# Altium PCB OPLink Mini.PcbDoc
Units mil, origin at the board's own origin, x right, y up, seen from the top; angles counter-clockwise.
Board outline 826.77 x 1063.1 mil, 4 copper layers (Top Layer, PWR, GND, Bottom Layer), stack 39 mil thick; 43 components, 44 nets, 186 pads, 149 vias.
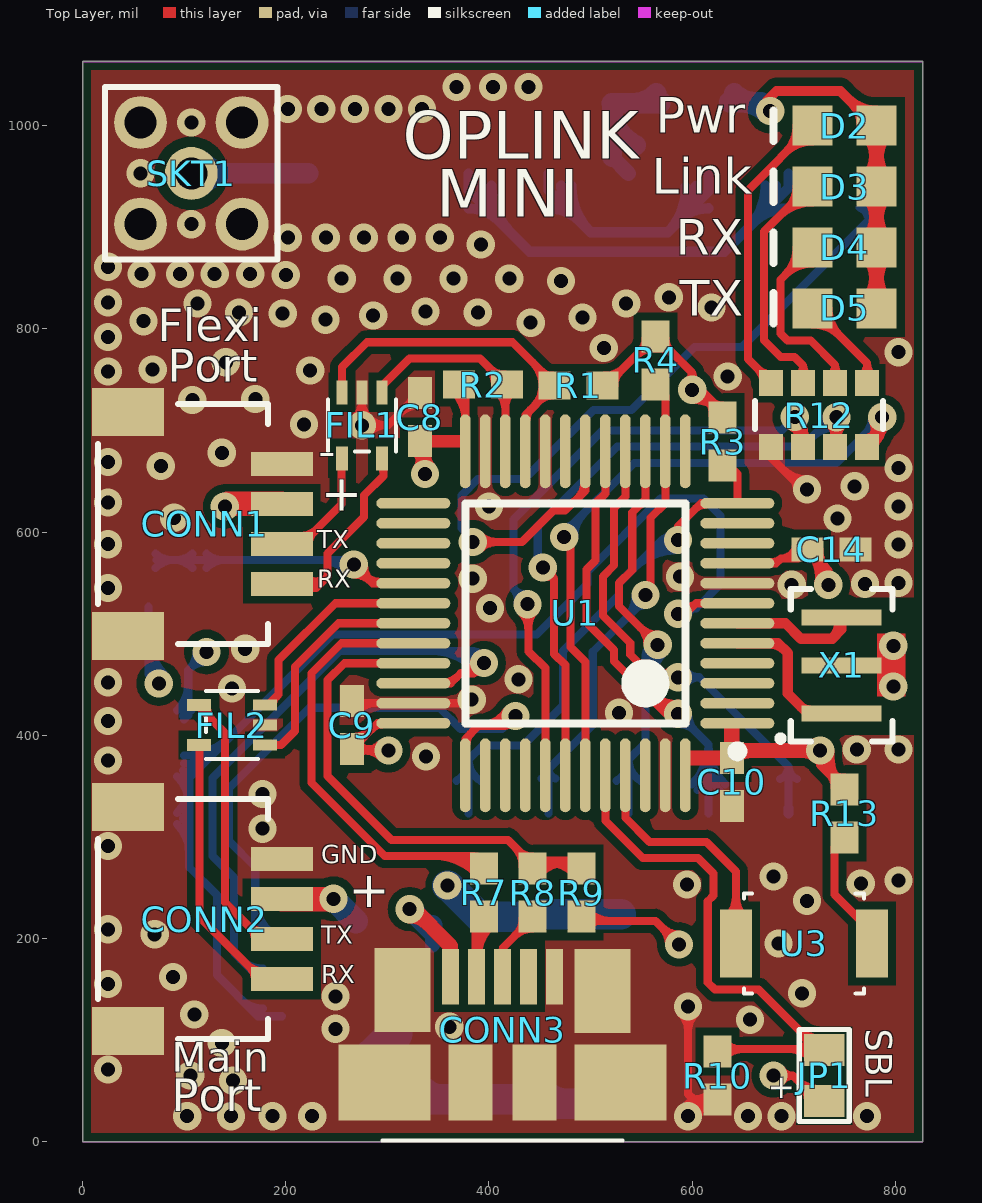
[diagram p0: Top Layer view]
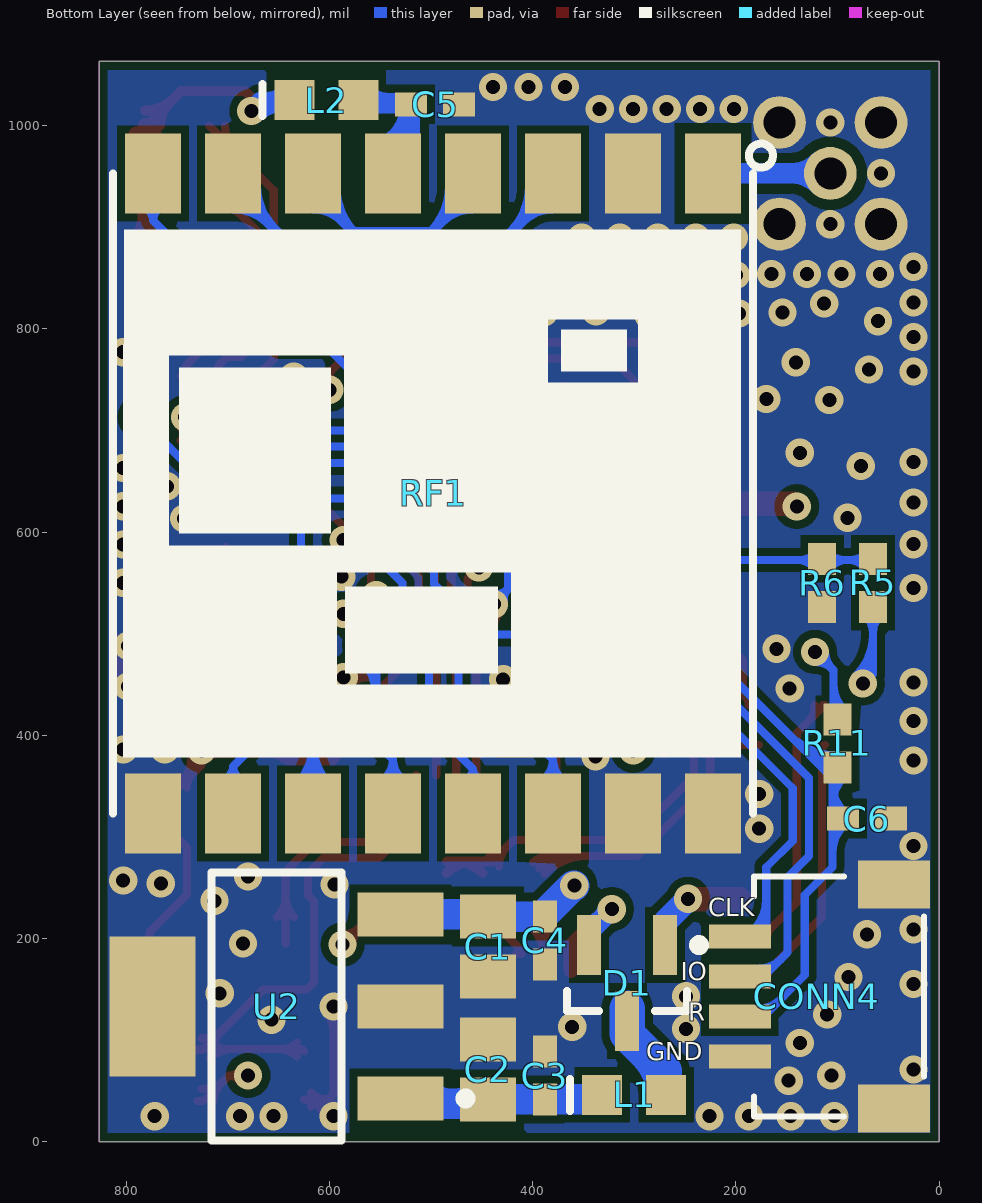
[diagram p1: Bottom Layer view, seen from below]
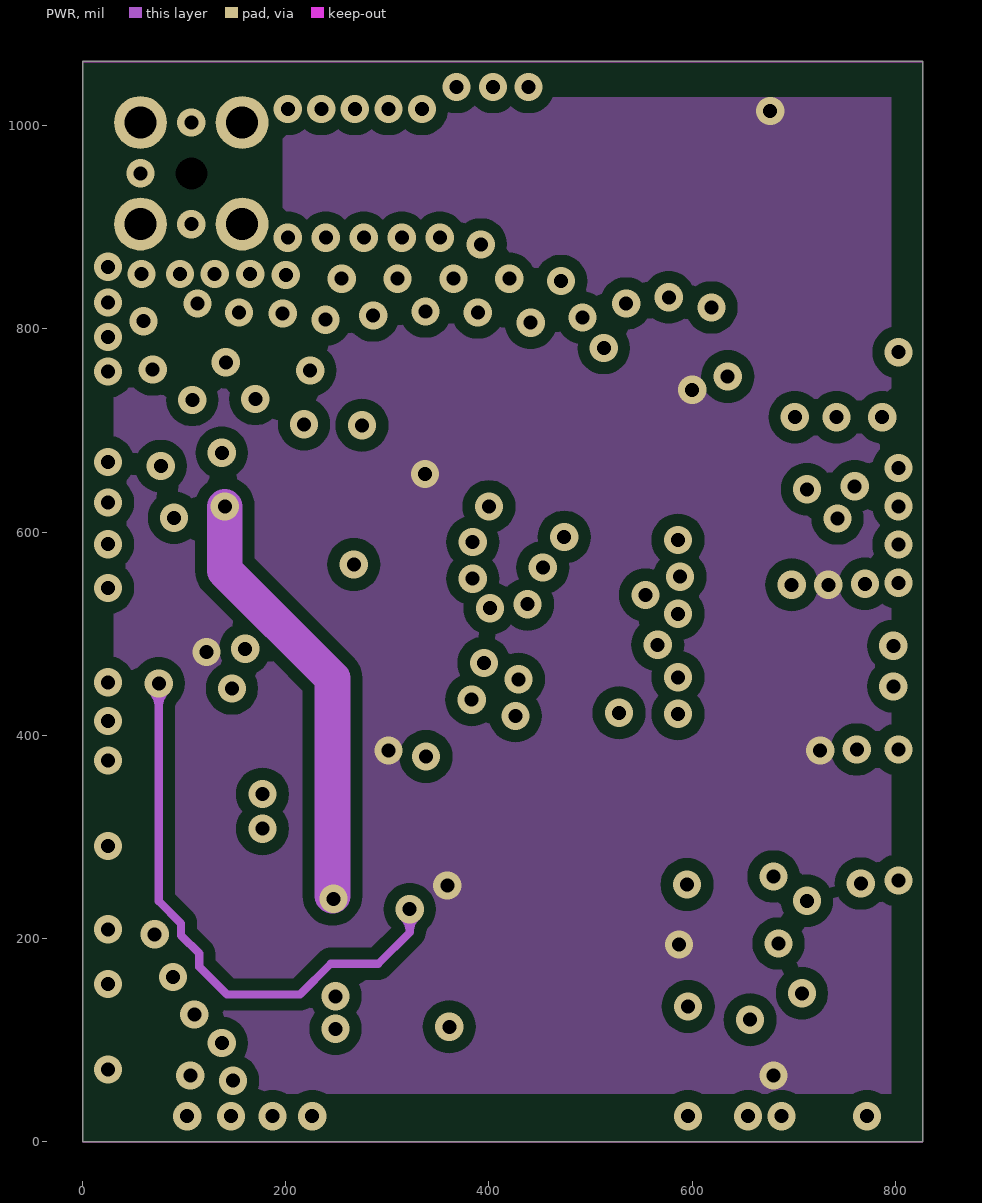
[diagram p2: PWR]
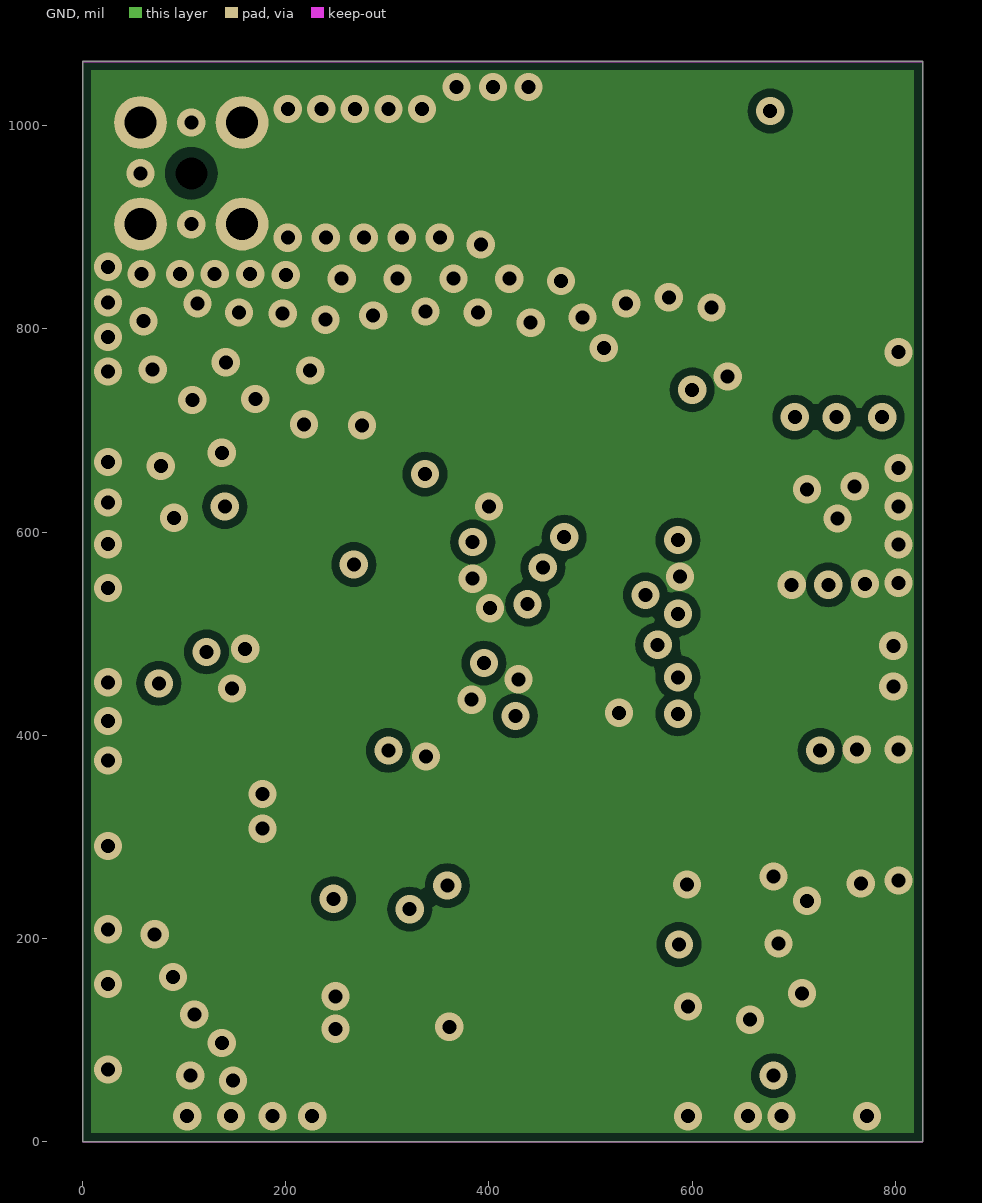
[diagram p3: GND]
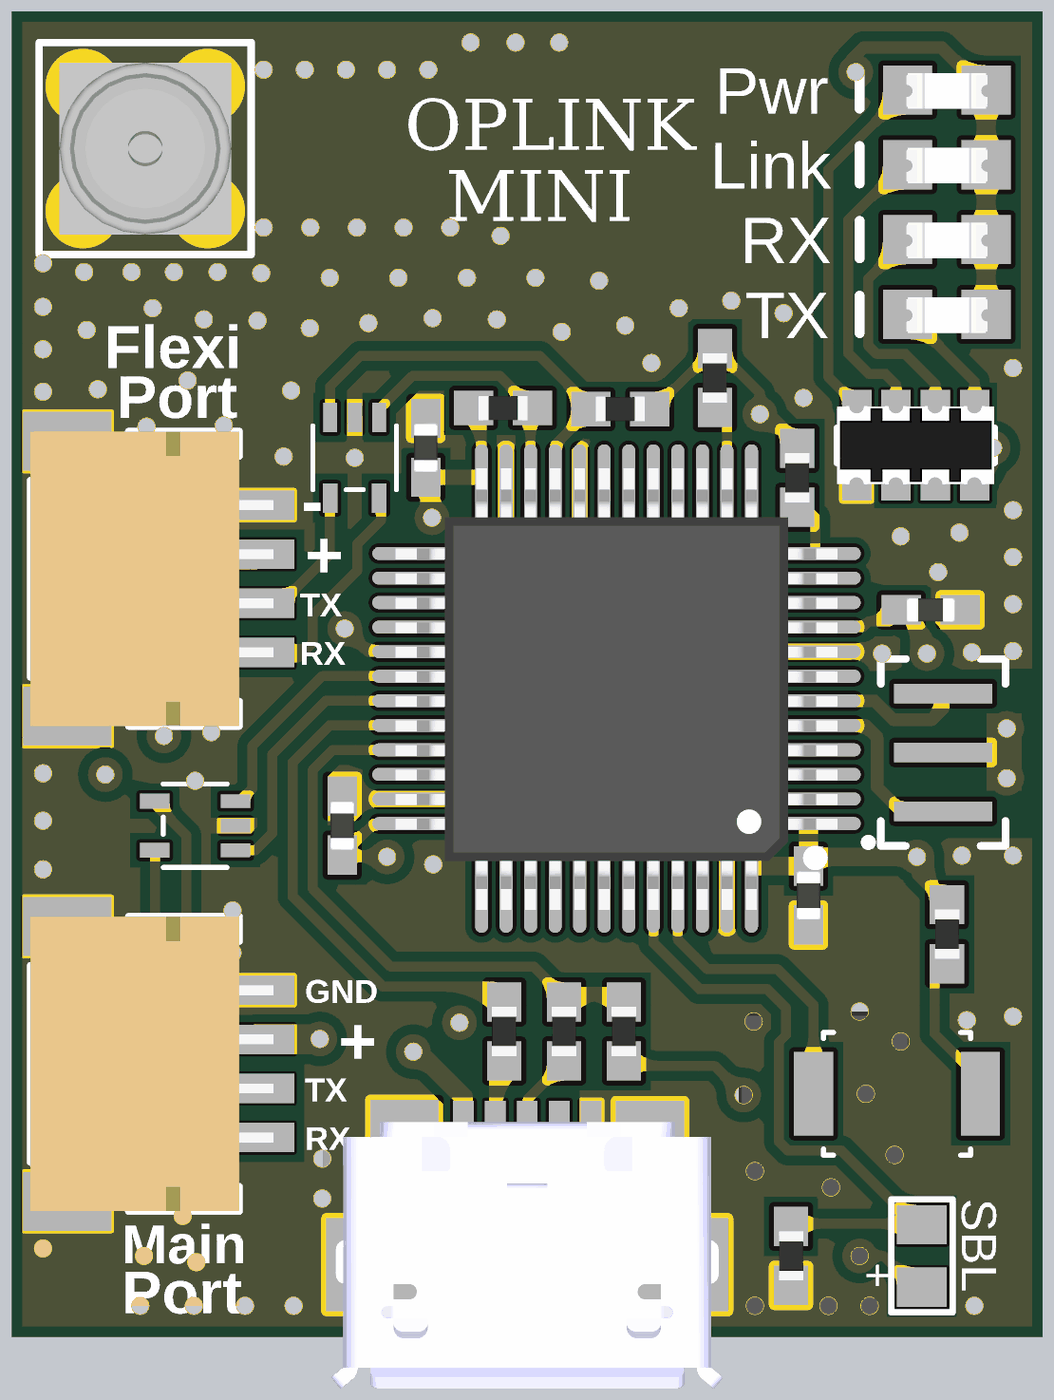
[diagram p4: 3D render of the assembled board from above, using the file's embedded part models]
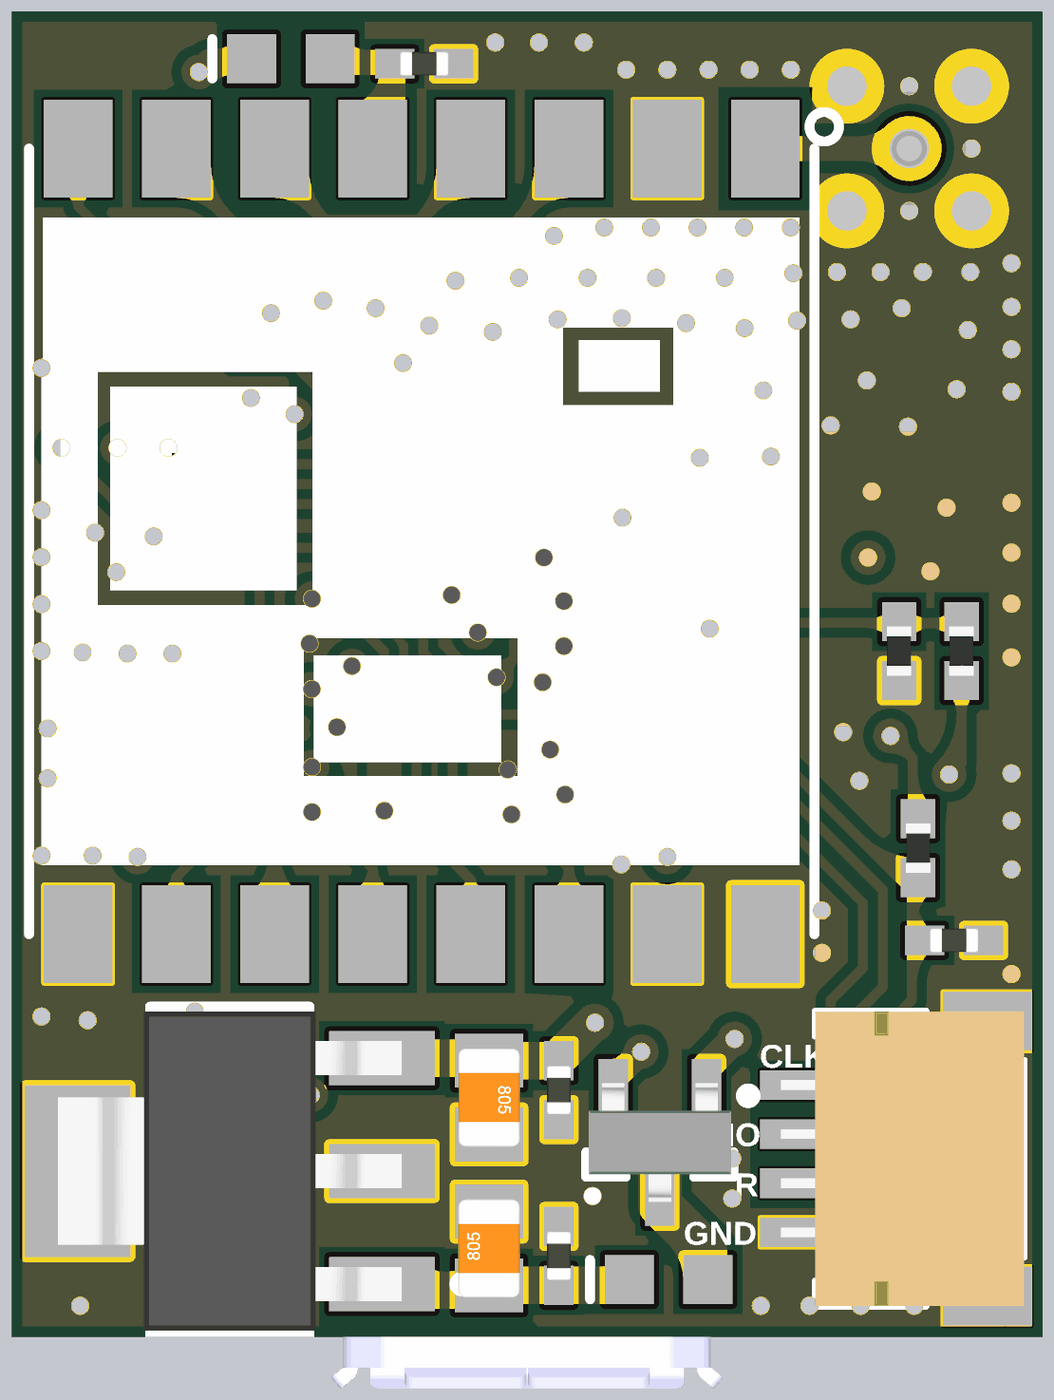
[diagram p5: 3D render of the assembled board from below, using the file's embedded part models]

## Layer stack, top to bottom
Top Layer: signal copper 2.1
Dielectric: prepreg 9, FR-4, Dk 4.3
PWR: signal copper 2.1
Dielectric: core 12.6, FR-4, Dk 4.8
GND: signal copper 2.1
Dielectric: prepreg 9, FR-4, Dk 4.8
Bottom Layer: signal copper 2.1

## Board outline
0,0 826.77,0 826.77,1063.1 0,1063.1

## Design rules (kind name [scope] priority, off if disabled: settings)
Clearance "Wave Guide Clearance" [InPolygon vs InNet('ANT')] p1: gap=10
Clearance "PWR Pull back" [(InNamedPolygon('PWR Layer-VCC')) vs OnLayer('Keep-Out Layer')] p2: gap=30
Clearance "Clearance Small Parts" [HasFootprint('TC164')] p3: gap=6
Clearance "PWR Layer Clearance" [(InNamedPolygon('PWR Layer-VCC'))] p4: gap=12
Clearance [All] p5: gap=8
DiffPairsRouting [All] p1: maxlimit=10 minlimit=10 mostfreqgap=10 maxuncoupledlength=500
FabricationTestPointUsage TestPointUsage [All] p1: valid=0 allowmultiple=FALSE
FabricationTestpoint Testpoint [All] p1: side=3 testpointundercomponent=TRUE minsize=40 maxsize=100 preferedsize=60 minholesize=0 maxholesize=40 preferedholesize=32 testpointgrid=1 allowsidetop=TRUE allowsidebottom=TRUE usegrid=TRUE gridtolerance=0.01
HoleSize [All] p1: absolutevalues=TRUE maxlimit=160 minlimit=13 maxpercent=80.000 minpercent=20.000
MinimumSolderMaskSliver [All] p1: minsoldermaskwidth=3
PolygonConnect [All] p1: connectstyle=Direct reliefconductorwidth=15 reliefentries=4 polygonreliefangle="90 Angle" airgapwidth=10
RoutingVias [All] p1: holewidth=13.78 width=27.68 viastyle="Through Hole" minholewidth=11.81 minwidth=27.56 maxholewidth=31.5 maxwidth=55.12
SilkToSilkClearance [All] p1: silktosilkclearance=6
SilkToSolderMaskClearance SilkscreenOverComponentPads [IsPad] p1: minsilkscreentomaskgap=3 clearancetoexposedcopper=TRUE
SolderMaskExpansion [All] p1: expansion=4
Width [All] p1: maxlimit=80 minlimit=8 preferedwidth=10 minimp=50.000000 maximp=50.000000 favimp=50.000000
21 further rules are at their usual default settings.

## Classes and differential pairs
differential pair USB_R: +USB_R_P -USB_R_N

## Components (designator, comment, footprint, x,y, rotation, side; value= is the part's Value field where it differs from the comment)
C1 "Cap805" CAP805L 444,192 r270 bottom
C2 "Cap805" CAP805L 444,71 r90 bottom
C3 "10n" CAP402N 388,65 r90 bottom
C4 "10n" CAP402N 388,198 r270 bottom
C5 "Cap402" CAP402N 496,1021 r180 bottom
C6 "Cap402" CAP402N 71,318 r180 bottom
C8 "Cap402" CAP402N 332,713 r270 top
C9 "Cap402" CAP402N 265,410 r270 top
C10 "Cap402" CAP402N 639,354 r90 top
C14 "Cap402" CAP402N 737,583 r0 top
CONN1 "Flexi Port" "JST SH 4 Pin Side Entry" 15,608 r270 top
CONN2 "USART 1" "JST SH 4 Pin Side Entry" 15,219 r270 top locked
CONN3 "Micro USB B" Micro_USB 413.39,58 r0 top
CONN4 "SWD" "JST SH 4 Pin Side Entry" 15,143 r90 bottom
D1 "BAT54C" SOT23-3N 307,156 r270 bottom
D2 "PWR" LED603N 750,1000 r0 top
D3 "Status" LED603N 750,940 r0 top
D4 "RX" LED603N 750,880 r0 top
D5 "TX" LED603N 750,820 r0 top
FIL1 "IP4256CZ5-W,115" SOT-665 275,705 r270 top
FIL2 "IP4256CZ5-W,115" SOT-665 147,410 r180 top
JP1 "2 PAD Touch JMP" "TOUCH JMP 2PAD" 730,65 r0 top
L1 "300mA" IND603N 300,46 r180 bottom
L2 "300mA" IND603N 603,1025 r180 bottom
R1 "Res402" RES402N 488,744 r180 top
R2 "Res402" RES402N 394,745 r0 top
R3 "Res402" RES402N 630,689 r270 top
R4 "Res402" RES402N 564,769 r270 top
R5 "Res402" RES402N 65,550 r270 bottom
R6 "Res402" RES402N 115,550 r270 bottom
R7 "Res402" RES402N 395,245 r270 top
R8 "Res402" RES402N 443,245 r270 top
R9 "Res402" RES402N 491,245 r270 top
R10 "Res402" RES402N 625,65 r90 top
R11 "Res402" RES402N 100,392 r90 bottom
R12 "Res Array 330R 1206" TC164 725,715 r0 top
R13 "Res402" RES402N 750,323 r90 top
RF1 "RFM22B-S2" RFM22-S2 498,638 r270 bottom locked
SKT1 "MMCX Thru hole" MMCX_SOCKET 107,953 r0 top locked
U1 "STM32F103CBT6" "STM32 48 Lead" 485,520 r180 top
U2 "TL1963A-33" SOT223 652,133 r90 bottom
U3 "Bind" B3U-1000P 710,195 r180 top
X1 "8Mhz Ceralock" "CERALOCK 8Mhz" 747,468.76 r90 top

## Footprints (in the part's own frame and the unit in brackets; to place one, negate y for a bottom-side part, rotate by r counter-clockwise, add the part's x,y. Pads: shape width x height; smd on the part's side, far side on the other; paste and mask are expansions set on the pad)
B3U-1000P [mm] "SWITCH TACTILE SPST-NO 0.05A 12V - SW1020CT-ND"
  rect 0.8x1.7 smd: A(-1.7,0) B(1.7,0)
  silkscreen extent -1.5,-1.25 1.5,1.25, body extent -1.5,-1.25 1.5,1.25, height 3.41
CAP402N [mm] "Chip Capacitor, Body 1.0x0.5mm, IPC Medium Density"
  rect 0.8x0.6 smd: 1(-0.6,0) 2(0.6,0)
  body extent -0.5,-0.25 0.5,0.25, height 0.6
CAP805L [mm] "Chip Capacitor, Body 2.0x1.3mm, IPC High Density"
  rect 1.1x1.4 smd: 1(-0.75,0) 2(0.75,0)
  body extent -1,-0.62 1,0.63, height 0.78
"CERALOCK 8Mhz" [mm] "Digikey 490-1195-1-ND"
  rect 0.4x2 smd: 1(-1.2,0) 2(1.2,0) 3(0,0)
  silkscreen extent -1.91,-1.27 1.91,1.58, body extent -1.78,-1.14 1.78,1.14, height 0.5
IND603N [mm] "Chip Inductor, Body 1.6x0.8mm, IPC Medium Density"
  rect 1x1 smd: 1(-0.8,0) 2(0.8,0)
  silkscreen extent -1.6,-0.4 -1.6,0.4, body extent -0.87,-0.48 0.87,0.48, height 0.71
"JST SH 4 Pin Side Entry" [mm] "SM04B-SRSS-TB"
  rect 1.2x1.8 smd paste+0 mask+0.051: 0(-2.8,0.75) 0(2.8,0.75)
  rect 0.6x1.55 smd paste+0 mask+0.051: 1(-1.5,4.6) 2(-0.5,4.6) 3(0.5,4.6) 4(1.5,4.6)
  silkscreen extent -3,0 3,4.25, body extent -3,0 3,4.95, height 2.92
LED603N [mm] "Chip LED, Body 1.6x0.8mm, IPC Medium Density"
  rect 1x1 smd: 1(-0.8,0) 2(0.8,0)
  silkscreen extent -1.78,-0.38 -1.78,0.38, body extent -0.82,-0.38 0.82,0.34, height 0.68
Micro_USB [mm] "Digikey WM17141CT-ND"
  rect 2.3x1.9 smd: 0(-2.946,0) 0(2.946,0)
  rect 1.4x2.1 smd: 0(-2.5,2.311) 0(2.5,2.286)
  rect 1.1x1.9 smd: 0(-0.8,0) 0(0.8,0)
  rect 0.425x1.38 smd mask+0.064: 1(-1.3,2.65) 2(-0.65,2.65) 3(0,2.65) 4(0.65,2.65) 5(1.3,2.65)
  silkscreen extent -3,-1.45 3,-1.45, body extent -3.99,-2.53 3.99,2.9, height 2.69
MMCX_SOCKET [mil] "Digikey ARF1729-ND and 07248"
  round 52 / inner round 0 / far side round 52 hole 31.5: 1(0,0)
  round 52 hole 31.5: 2(-50,-50) 2(-50,50) 2(50,-50) 2(50,50)
  silkscreen extent -85,-85 85,85, body extent -69,-69 69,69, height 177
RES402N [mm] "Chip Resistor, Body 1.1x0.5mm, IPC Medium Density"
  rect 0.8x0.7 smd: 1(-0.6,0) 2(0.6,0)
  body extent -0.5,-0.25 0.5,0.25, height 0.27
RFM22-S2 [mm] "SMT RFM22"
  rect 2x1.4 smd mask+0.051: 1(-8,7) 2(-8,5) 3(-8,3) 4(-8,1) 5(-8,-1) 6(-8,-3) 7(-8,-5) 8(-8,-7) 9(8,-7) 10(8,-5) 11(8,-3) 12(8,-1) 13(8,1) 14(8,3) 15(8,5)
  rect 2x1.4 smd: 16(8,7)
  silkscreen extent -8.74,-8 8,8.5, body extent -8.1,-8 8,8.05, height 1.9
SOT23-3N [mm] "SOT23, 3-Leads, Body 2.9x1.3mm, Pitch 0.95mm, Lead Span 2.5mm, IPC Medium Density"
  rect 1.5x0.6 smd: 1(-0.95,0.95) 2(-0.95,-0.95) 3(0.95,0)
  silkscreen extent -1.07,-1.5 0.7,1.92, body extent -1.21,-1.45 1.21,1.45, height 0.99
SOT223 [mm] "SOT-223/SC-73; 4 Leads; Body 6.7 x 7.3 mm, inc. leads (LxW max)"
  rect 1.1x2.15 smd: 1(-2.3,-3.1) 2(0,-3.1) 3(2.3,-3.1)
  rect 3.5x2.15 smd: 4(0,3.1)
  silkscreen extent -3.35,-4.85 3.35,1.63, body extent -3.25,-3.5 3.25,3.5, height 1.65
SOT-665 [mm] "NXP SOT665"
  rect 0.6x0.28 smd mask+0.076: 1(-0.825,0.5) 2(-0.825,0) 3(-0.825,-0.5)
  rect 0.6x0.3 smd mask+0.076: 4(0.825,-0.5) 5(0.825,0.5)
  silkscreen extent -0.65,-0.85 0.65,0.85, body extent -0.65,-0.85 0.65,0.85, height 0.6
"STM32 48 Lead" [mm] "Thin QFP, 48-Leads, Body 7x7mm, Pitch 0.5mm, IPC Medium Density"
  oval 1.85x0.265 smd mask+0.076: 1(-4.05,2.75) 2(-4.05,2.25) 3(-4.05,1.75) 4(-4.05,1.25) 5(-4.05,0.75) 6(-4.05,0.25) 7(-4.05,-0.25) 8(-4.05,-0.75) 9(-4.05,-1.25) 10(-4.05,-1.75) 11(-4.05,-2.25) 12(-4.05,-2.75) 25(4.05,-2.75) 26(4.05,-2.25) 27(4.05,-1.75) 28(4.05,-1.25) 29(4.05,-0.75) 30(4.05,-0.25) 31(4.05,0.25) 32(4.05,0.75) 33(4.05,1.25) 34(4.05,1.75) 35(4.05,2.25) 36(4.05,2.75)
  oval 0.265x1.85 smd mask+0.076: 13(-2.75,-4.05) 14(-2.25,-4.05) 15(-1.75,-4.05) 16(-1.25,-4.05) 17(-0.75,-4.05) 18(-0.25,-4.05) 19(0.25,-4.05) 20(0.75,-4.05) 21(1.25,-4.05) 22(1.75,-4.05) 23(2.25,-4.05) 24(2.75,-4.05) 37(2.75,4.05) 38(2.25,4.05) 39(1.75,4.05) 40(1.25,4.05) 41(0.75,4.05) 42(0.25,4.05) 43(-0.25,4.05) 44(-0.75,4.05) 45(-1.25,4.05) 46(-1.75,4.05) 47(-2.25,4.05) 48(-2.75,4.05)
  silkscreen extent -4.18,-2.75 2.75,3.57, body extent -4.5,-4.49 4.5,4.51, height 1.56
TC164 [mm] "4-Resistor Array"
  rect 0.6x0.65 smd mask+0.064: 1(-1.2,-0.8) 2(-0.4,-0.8) 3(0.4,-0.8) 4(1.2,-0.8) 5(1.2,0.8) 6(0.4,0.8) 7(-0.4,0.8) 8(-1.2,0.8)
  silkscreen extent -1.6,-0.35 1.6,0.35, body extent -1.6,-0.8 1.6,0.8, height 0.55
"TOUCH JMP 2PAD" [mil] "Touch Jumper 2 Pad"
  rect 40x31.5 smd mask+2: 1(0,25) 2(0,-25)
  silkscreen extent -25,-45 25,45

## Part data
C1 C2 C5 C6 C8 C9 C10 C14: "Capacitor SMD"
C3 C4: library part Cap402, "Capacitor SMD"
CONN1 CONN2 CONN4: library part "JST-SH 4-pin Side Entry Socket", "JST-SH 4-pin Side Entry Socket"
CONN3: library part "USB Micro B SMT", "USB Micro B SMT Socket"
D1: "Dual Diode Command Cathode"
D2: library part "LED 603 Gr", "Green 603 LED"
D3: library part "LED 603 Bl", "Blue 603 LED"
D4: library part "LED 603 Or", "Orange 603 LED"
D5: library part "LED 603 Yellow", "Yellow 603 LED"
FIL1 FIL2: library part "RF Filter 100R 30pF", "IP4256CZ5-W,115 2 channel, 100R, 30pF, RF ESD Filter"
JP1: "2 Pad Touch Jumper"
L1 L2: library part FerriteBead_300mA, "Ferrite Bead 300mA"
R1 R2 R3 R4 R5 R6 R7 R8 R9 R10 R11 R13: "Resistor SMD"
R12: library part "Res Array 330R", "4 Resistor Array"
RF1: "UHF 100mW Transceiver"
SKT1: "MMCX Socket"
U1: "STM32 ARM-based 32-bit MCU with 128 Kbytes Flash, 48-pin LQFP, Industrial Temperature"
U2: "3.3V 1.5A LDO Regulator"
U3: library part "Push Switch Small"
X1: library part CERALOCK8, "Ceralock 8Mhz with caps"

## Via types
v1: diameter 27.8, hole 13.78, Top Layer to Bottom Layer, tented both sides, 149 vias

## Nets (pads, with @x,y where several pads share a name; then routed paths per layer and width w, separated by ;. In a path a pad name is that pad's centre, name@x,y a point inside that pad or via, vN(x,y) a via of type N, cw(c..) or ccw(c..) an arc to the next point about the centre after c; other vN are vias at no path point)
ANT: RF1.1 SKT1.1 | length 176.1
  Bottom Layer w20: SKT1.1 222.37,953 RF1.1 ; SKT1.1@118.31,941.69 cw(c145.63,914.37) 145.63,953 cw(c145.63,991.63) SKT1.1@118.31,964.31
BOOT: JP1.1 R10.2 U1.44 | length 667.1
  Top Layer w8: U1.44 514.53,315.85 551.37,279 605.77,279 621,263.77 621,242.23 615.32,236.55 615.32,156.56 622.35,149.54 665.46,149.54 JP1.1@724,91 ; R10.2 627.38,91 JP1.1@724,91 ; R10.2@631.92,83.68 cw(c649.6,65.99) 649.6,91 ; R10.2@631.92,97.51 ccw(c647.62,113.21) 647.62,91 ; 694.97,91 cw(c694.97,59.22) JP1.1@717.44,81.69 ; 699.8,91 ccw(c699.8,115.95) JP1.1@717.44,98.31 ; 704.42,110.58 ccw(c725.75,131.92) JP1.1@725.75,101.75 ; 706.22,108.78 cw(c687.44,90) JP1.1@714,90 ; JP1.1@740,90 JP1.1 ; JP1.1@724,91 725,90 JP1.1 ; JP1.1@724,91 729,91 JP1.1
GND: C1.2 C2.2 C3.2 C4.2 C5.2 C6.2 C8.1 C9.1 C10.1 C14.2 CONN1.0 CONN1.1 CONN2.0 CONN2.1 CONN3.0 CONN3.5 CONN4.0 CONN4.1 FIL1.2 FIL2.2 R6.2 R10.1 R12.1 RF1.2 RF1.9 RF1.15 RF1.16 SKT1.2 U1.8 U1.20 U1.23 U1.35 U1.47 U2.2 U2.4 X1.3 | length 718.7
  Top Layer w8: C9.1 267.2,431.42 U1.35 379.42,431.42 v1(383,435) ; v1@268,712 ccw(c251.11,728.89) 275,728.89 ccw(c298.89,728.89) 282,712 ccw(c298.89,728.89) 298.89,705 ccw(c298.89,681.11) v1@282,698 ; C9.1@270.52,424.16 cw(c288.04,406.65) 288.04,431.42 ; C9.1@270.52,435.21 ccw(c279.68,444.36) 279.68,431.42 ; FIL1.2 v1(275,705) 300.38,705 C8.1 ; 311.94,716.57 cw(c332,696.51) C8.1@332,724.87 ; C8.1@321.45,726.07 ccw(c314.84,732.69) C8.1@324.19,732.69 ; v1@589,126 cw(c572.11,109.11) 596,109.11 cw(c619.89,109.11) v1@603,126 ; v1@589.93,25.6 cw(c607.34,23.88) 607.34,41.38 ; v1(596,133) 596,47.02 601.65,41.38 ; v1@597.89,24.81 cw(c616.17,23.01) R10.1@616.17,41.38 ; v1@605.85,24.03 cw(c625,22.14) R10.1 601.65,41.38 ; R10.1@618.03,34.52 ccw(c601.65,18.39) 601.65,41.38 ; R10.1@618.03,48.24 cw(c601.65,64.37) 601.65,41.38 ; R12.1@677.14,673.91 v1@713.02,638.02 ; 689.36,661.69 ccw(c713,685.34) v1@713,651.9 ; 698.9,652.15 cw(c688.75,642) v1@703.1,642 ; v1@714.52,650.48 v1@715,650
  other v1: 103,25 146,25 187,25 226,25 596,25 655,25 688,25 772,25 148,60 106,65 25,71 137,97 249,111 361,113 657,120 110,125 249,143 708,146 25,155 89,162 685,194.99 71,204 25,209 713,237 595,253 766,254 803,257 680,261 25,291 177,308 177,342 25,375 338,379 762,386 803,386 25,414 528,422 147,446 798,448 25,452 429,455 160,485 798,488 401,525 25,545 698,548 770,549 803,550 384,554 588,556 25,588 803,587.67 743,613.33 90,614 400,625 803,625.33 25,629 713,642 760,645 803,663 77,665 25,669 137,678 218,706 108,730 170,731 635,753 25,758 224,759 69,760 141,767 803,777 513,781 25,792 441,806 60,807.5 239,809 492,811 286,813 197,815 154,816 389,816 337.5,817 619,821 113,825 535,825 25,826 577,831 471,847 255,849.32 310,849.32 365,849.32 420,849.32 200,853 58,854 96,854 130,854 165,854 25,861 392,883 202,889.65 239.4,889.65 276.8,889.65 314.2,889.65 351.6,889.65 107,903 57,953 107,1003 202,1016.25 235,1016.25 268,1016.25 301,1016.25 334,1016.25 368,1038 404,1038 439,1038
"MDM INT": R3.2 RF1.14 U1.12 | length 687.7
  Top Layer w8: v1(586,592) 586,605.68 608.59,628.27 U1.12 644.45,656.93 R3.2@635,666.38 ; 603.21,622.89 cw(c613.25,612.86) U1.12@613.25,627.05
  Bottom Layer w8: RF1.14@368.01,355.2 ccw(c355.93,375.89) 379.89,375.89 ; RF1.14 379.89,375.89 ; RF1.14@391.77,355.2 cw(c403.85,375.89) 379.89,375.89 ; 542.43,564.06 cw(c586,520.49) v1@586,582.1 ; 556.09,577.71 cw(c586,547.8) v1@586,590.1 ; 569.74,591.37 cw(c586,575.11) v1@586,598.1 ; v1@577.05,587.77 ccw(c570.38,584.62) 570.38,592 ; v1@577.05,596.23 cw(c570.38,599.38) 570.38,592 ; v1(586,592) 570.38,592 ; 379.89,375.89 394,390 433.62,390 473,429.38 473,483 528.02,538.02 528.02,549.65 570.38,592
NetC2_1: C2.1 C3.1 L1.1 U2.1 | length 271.5
  Bottom Layer w30: L1.1@333.5,46 338.02,41.47 C2.1 445,41.47 449.02,37.45 U2.1@530.95,37.45 ; L1.1@334.81,49.31 ccw(c353.74,68.24) 353.74,41.47 ; C2.1@454.61,46.18 ccw(c475.68,67.25) 475.68,37.45 ; 481.15,37.45 ccw(c481.15,70.58) U2.1@504.58,47.15
NetC5_1: C5.1 L2.2 RF1.5 | length 202.5
  Bottom Layer w15: C5.1@520.62,1022 C5.1 518.62,1020 C5.1@521,1017.62 ; RF1.5@521,969.33 RF1.5 ; L2.2@568.5,1022 L2.2
  Bottom Layer w20: C5.1@520.62,1022 L2.2@568.5,1022 ; RF1.5@521,969.33 521,1017.62 ccw(c561.56,1017.62) RF1.5@544.68,980.74 ; 540.88,1022 ccw(c540.88,1055.62) L2.2@564.66,1031.85
NetCONN1_3: CONN1.3 FIL1.4 | length 145.5
  Top Layer w8: CONN1.3@200.1,584.31 212.03,584.31 255,627.29 FIL1.4@255,670.52 ; CONN1.3@214.8,596.13 ccw(c214.8,617.93) 230.22,602.51 ; CONN1.3@222.61,588.31 cw(c238.52,588.31) 227.27,599.56
NetCONN1_4: CONN1.4 FIL1.5 | length 246.7
  Top Layer w8: CONN1.4@200.1,544.94 229.94,544.94 ; CONN1.4@214.68,548.8 ccw(c224.19,560.48) 234.83,549.83 ; CONN1.4@219.73,555 ccw(c229.81,567.39) 241.1,556.1 ; CONN1.4@222.38,550.85 ccw(c229.94,552.74) 229.94,544.94 ; FIL1.5@293.34,665.27 cw(c286.66,658.59) 296.1,658.59 ; FIL1.5@296.1,671.1 296.1,655.1 277.13,636.13 277.13,614.76 241.1,578.73 241.1,556.1 ; 229.94,544.94 241.1,556.1
NetCONN2_3: CONN2.3 FIL2.4 | length 328.3
  Top Layer w8: FIL2.4@112.52,429.69 140,402.2 140,235.49 175.49,200 195.42,200 CONN2.3 ; FIL2.4@114.33,429.69 ccw(c118.7,429.69) FIL2.4@115.61,426.59 ; FIL2.4@122.33,429.69 ccw(c146.02,429.69) 129.27,412.94 ; 161.98,213.51 ccw(c177.4,228.93) CONN2.3@177.4,207.13 ; 164.93,210.56 cw(c153.68,199.31) CONN2.3@169.59,199.31
NetCONN2_4: CONN2.4 FIL2.5 | length 306.3
  Top Layer w8: FIL2.5@112.52,390.31 115,387.83 115,221.12 176.18,159.94 CONN2.4 ; 161.98,174.14 ccw(c177.4,189.56) CONN2.4@177.4,167.76 ; 164.93,171.19 cw(c153.68,159.94) CONN2.4@169.59,159.94
NetD1_3: D1.3 L1.2 | length 145
  Bottom Layer w35: L1.2@270.5,46 270.5,69.5 307,106 D1.3 D1.3@307,131 ; L1.2@270.69,46 cw(c327.88,46) 287.44,86.44
NetD2_1: D2.1 R12.8 | length 371.7
  Top Layer w8: 664.02,760.98 ccw(c677.76,774.72) R12.8@677.76,755.29 ; 664.59,760.41 cw(c651.66,747.48) R12.8@669.94,747.48 ; R12.8@673.5,751.5 654.82,770.18 654.82,936.31 D2.1 ; D2.1@702.82,1000 cw(c664.95,1000) 691.73,973.22 cw(c718.5,946.45) D2.1@718.5,984.31
NetD3_1: D3.1 R12.7 | length 342.1
  Top Layer w8: 685.75,910.75 cw(c718.5,877.99) D3.1@718.5,924.31 ; 694.21,919.21 ccw(c673.41,940) D3.1@702.82,940 ; D3.1@699.4,924.4 cw(c718.5,905.3) D3.1@718.5,932.31 ; R12.7@704.37,753.58 ccw(c696.22,763.75) 709.25,763.75 ; R12.7 709.25,763.75 ; R12.7@714.14,753.58 cw(c722.28,763.75) 709.25,763.75 ; D3.1@716.75,941.75 670.82,895.82 670.82,788.72 687.22,772.31 700.69,772.31 709.25,763.75
NetD4_1: D4.1 R12.6 | length 261.4
  Top Layer w8: D4.1@702.82,880 cw(c664.95,880) 691.73,853.22 cw(c718.5,826.45) D4.1@718.5,864.31 ; D4.1 686.82,848.31 686.82,795.34 693.85,788.31 716.69,788.31 740.75,764.25 ; R12.6@735.72,753.46 ccw(c726.65,764.25) 740.75,764.25 ; R12.6@740.75,751.5 740.75,764.25 ; R12.6@745.77,753.46 cw(c754.85,764.25) 740.75,764.25
NetD5_1: D5.1 R12.5 | length 179.7
  Top Layer w8: D5.1@718.5,804.31 cw(c718.5,766.45) 745.28,793.22 cw(c772.06,820) D5.1@734.19,820 ; D5.1 772.24,766.26 ; R12.5@766.74,753.02 ccw(c753.58,766.26) 772.24,766.26 ; R12.5@772.24,751.5 772.24,766.26 ; R12.5@777.75,753.02 cw(c790.91,766.26) 772.24,766.26
NetFIL1_1: FIL1.1 R2.2 U1.22 | length 289.8
  Top Layer w8: FIL1.1 294.68,743.84 321.63,770.78 391.1,770.78 416.1,745.77 U1.22 ; 398.09,763.78 cw(c379.31,745) R2.2@405.87,745 ; 401.05,760.83 ccw(c415.65,775.44) R2.2@415.65,754.78 ; R2.2@408.74,738.08 cw(c390.96,720.31) 416.1,720.31 ; 416.1,722.47 cw(c438.18,722.47) R2.2@422.57,738.08
NetFIL1_3: FIL1.3 R1.2 U1.21 | length 424.4
  Top Layer w8: FIL1.3 255.31,762.31 279.78,786.78 423.22,786.78 464.69,745.31 463.91,744.4 458.38,737.9 435.79,715.31 U1.21 ; U1.21@437,710.65 cw(c451.2,710.65) 441.16,720.69 ; 443.18,766.82 cw(c420.35,744) 452.63,744 cw(c424.03,744) 444.25,723.78 ; 449.24,728.77 cw(c462.41,715.6) R1.2@462.41,734.22 ; 451.84,758.16 ccw(c462.41,768.72) R1.2@462.41,753.78
NetR5_1: R5.1 R6.1 U1.29 | length 494.9
  Top Layer w8: v1@267,558.1 cw(c267,534.21) 283.9,551.1 cw(c300.79,568) v1@276.9,568 ; v1(267,568) 285.47,549.53 U1.29 ; v1@269.56,558.44 cw(c272.47,547.57) 278.1,557.32 ; v1@276.25,564.47 ccw(c282.1,562.24) 278.97,556.81 ; 277.12,557.88 ccw(c294.35,575.11) U1.29@294.35,550.74
  Bottom Layer w8: R5.1@71.92,564.74 cw(c90.95,545.71) 90.95,572.62 ; R5.1@71.92,578.57 ccw(c86.27,592.93) 86.27,572.62 ; R5.1@73,572.62 262.38,572.62 v1(267,568) ; 89.05,572.62 cw(c89.05,545.71) R6.1@108.08,564.74 ; 93.73,572.62 ccw(c93.73,592.93) R6.1@108.08,578.57 ; R6.1@121.92,564.74 cw(c140.95,545.71) 140.95,572.62 ; R6.1@121.92,578.57 ccw(c136.27,592.93) 136.27,572.62 ; 231.95,572.62 cw(c231.95,532.95) v1@260,561 ; 251.26,572.62 cw(c251.26,552.26) v1@265.66,566.66
NetR7_1: R7.1 U1.32 | length 517.2
  Top Layer w8: U1.32 254.69,490.47 225.19,460.97 225.19,353.18 297.37,281 382,281 387.38,275.62 R7.1@396,275.62 ; 346.26,281 cw(c346.26,221.85) R7.1@388.08,263.68 ; 365.57,281 cw(c365.57,241.16) R7.1@393.74,269.33 ; R7.1@384.89,281 cw(c384.89,260.48) R7.1@399.4,274.99
NetR8_1: R8.1 R9.1 U1.33 | length 560.8
  Top Layer w8: U1.33 257.64,470.79 241.19,454.34 241.19,359.81 304,297 418.62,297 R8.1@440,275.62 ; 424.87,290.75 cw(c404.71,270.59) R8.1@433.22,270.59 ; 429.77,285.85 ccw(c443,299.08) R8.1@443,280.37
  Top Layer w10: R8.1@440,275.62 R9.1@484,275.62 ; R8.1@449.21,264.38 cw(c476.34,237.25) 476.34,275.62 ; 457.66,275.62 cw(c457.66,237.25) R9.1@484.79,264.38
NetR12_2: R12.2 U1.41 | length 773.8
  Top Layer w8: v1@431,522 cw(c411.69,502.69) 439,502.69 ; v1(438,529) 439,528 439,482.49 455.47,466.02 U1.41 ; 439,507.52 cw(c459.48,507.52) v1@445,522 ; v1@696.28,704.42 cw(c684.07,682.4) R12.2@709.25,682.4 ; v1@700.16,711.42 cw(c691.6,695.97) R12.2@709.25,695.97 ; v1@700.37,711.31 cw(c694.27,696.16) 710.04,700.39 ; v1(701.08,713.08) 701.08,712.92 709.25,704.75 R12.2 ; R12.2@703.73,690.01 ccw(c690.39,703.35) 709.25,703.35 ccw(c728.11,703.35) R12.2@714.78,690.01
  Bottom Layer w8: v1@428.24,530.67 ccw(c413.23,533.23) 424,544 ; v1@437.43,538.88 cw(c436.43,556.43) 424,544 ; v1(438,529) 438,530 424,544 ; v1(701.08,713.08) 688,700 511.77,700 424,612.23 424,544
NetR12_3: R12.3 U1.42 | length 774.6
  Top Layer w8: v1(453,565) 464.1,553.9 ; v1@456.3,555.67 cw(c458.8,548.59) 464.1,553.9 ; v1@462.33,561.7 ccw(c469.41,559.2) 464.1,553.9 ; U1.42 475.16,468.96 464.1,480.02 464.1,553.9 ; v1@735,706 cw(c718.11,689.11) 742,689.11 cw(c765.89,689.11) v1@749,706 ; R12.3@735.22,690.01 ccw(c718.87,706.37) v1@742,706.37 ; v1@736.91,704.51 cw(c733.75,699.26) 739.67,697.67 cw(c748.07,695.42) v1@745.23,703.65 ; v1@737.86,704.01 cw(c734.31,696.33) 742.48,698.52 cw(c746.58,699.62) v1@745.21,703.64 ; R12.3 742,684.76 v1(742,713) ; v1@742,700.32 ccw(c756.58,700.32) R12.3@746.27,690.01
  Bottom Layer w8: v1@448,565 448,605.77 526.23,684 708.77,684 737.77,713 v1(742,713) ; 717.88,693.11 cw(c742,668.99) v1@742,703.1 ; 728.1,703.33 ccw(c718.42,713) v1@732.1,713
NetR12_4: R12.4 U1.43 | length 873.2
  Top Layer w8: v1@480.1,589.1 480.1,486.65 494.84,471.91 U1.43 ; R12.4@770.45,692.09 ccw(c765.52,713) v1(787,713) 787,698.26 ; R12.4@772.29,684.3 ccw(c767.9,702.89) v1@787,702.89 ; R12.4@772.34,692.3 ccw(c772.61,712.65) 787,698.26 ; v1@777.76,709.45 cw(c755.03,700.72) R12.4 787,698.26 ; R12.4@780.06,684.49 cw(c796.54,684.49) 784.88,696.14 ; R12.4@780.96,692.22 ccw(c767.61,705.56) v1@785.23,712.32 ; v1@782.7,704.09 cw(c780.31,699.14) 785.61,697.72 cw(c794.73,695.28) v1@790.96,703.93 ; v1@783.25,703.84 cw(c780.97,698.26) 787,698.26 ; v1@790.75,703.84 ccw(c793.03,698.26) 787,698.26
  Bottom Layer w8: v1(474,595) 474,599 543,668 742,668 v1(787,713) ; v1@474,604.9 ccw(c474,619.14) 484.07,609.07 ; v1@483.9,595 cw(c517.45,595) 493.72,618.72 ; v1@777.1,713 cw(c753.21,713) 770.1,696.1 cw(c787,679.21) v1@787,703.1
NetR13_1: R13.1 U3.A | length 126.8
  Top Layer w8: R13.1 740,289.38 740,243.38 776.93,206.45 U3.A U3.A@776.93,192
NetRF1_3: RF1.3 RF1.7 | length 629.6
  Bottom Layer w10: RF1.3@379.89,918.59 cw(c379.89,876.29) 409.8,906.2 ; RF1.3 379.89,936.11 440.1,875.9 631.9,875.9 694.85,938.85 RF1.7 ; RF1.3@392.45,941.15 ccw(c434.94,941.15) 404.89,911.11 ; RF1.3@402.45,941.15 ccw(c469.08,941.15) 421.96,894.04 ; 654.71,898.71 ccw(c612.28,941.15) RF1.7@672.29,941.15 ; 660.26,904.26 cw(c694.85,869.68) RF1.7@694.85,918.59 ; RF1.7@671.79,915.79 ccw(c646.42,941.15) RF1.7@682.29,941.15
NetRF1_4: RF1.4 RF1.6 | length 456.5
  Bottom Layer w10: RF1.4@458.63,918.59 cw(c458.63,875.67) 488.98,906.02 ; RF1.4 458.63,936.37 500,895 ; RF1.4@471.19,941.04 ccw(c511.96,940.7) 483.13,911.87 ; RF1.4@481.19,940.96 ccw(c545.41,940.42) 500,895 ; 587.91,906.91 cw(c616.11,878.71) RF1.6@616.11,918.59 ; 592.08,911.08 ccw(c564.26,938.9) RF1.6@603.56,940.6 ; RF1.6@593.57,940.17 cw(c533.45,937.56) 576,895 ; RF1.6 616.11,935.11 576,895 ; 500,895 576,895
NetRF1_8: RF1.8 U1.18 | length 869
  Top Layer w8: v1(383.97,590.12) 432.5,590.12 463.38,621 475,621 494.84,640.84 U1.18 ; v1@390.97,583.12 cw(c407.86,566.23) 407.86,590.12 cw(c407.86,614.02) v1@390.97,597.12 ; 487.53,633.53 ccw(c472.81,648.25) U1.18@493.63,648.25
  Bottom Layer w8: v1@387.83,589 373,603.83 373,636 389,652 435,652 503,720 540.38,720 602.38,782 649,782 773.59,906.59 ; RF1.8@764.98,919.22 cw(c760.02,906.59) 773.59,906.59 ; RF1.8 773.59,906.59 ; RF1.8@782.2,919.22 ccw(c787.16,906.59) 773.59,906.59
NetU1_5: U1.5 X1.1 | length 146.9
  Top Layer w10: U1.5 684.53,490.47 694,481 694,441 X1.1@713,422 ; U1.5@675.65,490.26 cw(c675.65,468.3) 691.17,483.83 ; 707.16,427.84 ccw(c715.5,436.19) X1.1@715.5,424.39
NetU1_6: U1.6 X1.2 | length 146.8
  Top Layer w10: U1.6 691.84,510.16 707,495 738,495 ; X1.2@744.18,515.43 cw(c722.01,510.99) 738,495 ; X1.2 747,504 738,495
NetU1_45: U1.45 U3.B | length 288
  Top Layer w8: U1.45 534.21,318.79 558,295 614,295 643.07,265.93 U3.B ; U3.B@634.76,221.02 ccw(c614.71,241.08) 643.07,241.08 ccw(c671.43,241.08) U3.B@651.38,221.02
NRST: C6.1 CONN4.2 R11.1 U1.7 | length 1426.5
  Top Layer w8: v1(586.13,519.51) 593.67,519.51 604,529.84 ; v1@591.04,528.11 ccw(c596.38,537.46) 604,529.84 ; U1.7 604,529.84
  Bottom Layer w8: C6.1@93.04,312.48 cw(c64.15,283.59) 105,283.59 ; C6.1@93.04,323.52 ccw(c64.15,352.41) 105,352.41 ; R11.1@93.08,359.49 cw(c64.32,330.73) 105,330.73 ; C6.1@98.69,317.87 ccw(c83.47,333.09) 105,333.09 ; C6.1@98.69,318.13 cw(c83.47,302.91) 105,302.91 ; R11.1@98.74,365.15 cw(c83.63,350.04) 105,350.04 ; R11.1@100,356.13 ccw(c100,363.67) R11.1@105.34,358.34 ; R11.1@100,364.13 ccw(c100,390.99) 118.99,371.99 ; R11.1@100,372.13 ccw(c100,418.3) 132.65,385.65 ; R11.1@100,380.13 ccw(c100,445.61) 146.31,399.31 ; 156.02,139.98 ccw(c177.4,161.37) CONN4.2@177.4,131.13 ; CONN4.2 172.68,123.31 132.14,163.86 132.14,242.86 105,270 105,358 246,499 447,499 496.91,548.91 496.91,560.91 569,633 611,633 628,616 628,549 604,525 ; v1@589,525 604,525 ; v1@595.92,518.04 cw(c604,516.83) 604,525
SPI1_MISO: RF1.10 U1.16 | length 567.8
  Top Layer w8: U1.16 534.21,634.96 523,623.75 523,567.25 512.1,556.35 512.1,517.53 539,490.63 539,479.38 561.38,457 v1(586,457) ; v1@579,450 ccw(c562.11,433.11) 562.11,457 ccw(c562.11,480.89) v1@579,464
  Bottom Layer w8: v1(586,457) 607,457 ; v1@593.63,450.7 cw(c607,439.67) 607,457 ; v1@593.63,463.3 ccw(c607,474.33) 607,457 ; RF1.10@686.4,356.84 ccw(c681.66,369.15) 694.85,369.15 ; RF1.10@694.85,328.2 694.85,369.15 ; RF1.10@703.3,356.84 cw(c708.04,369.15) 694.85,369.15 ; 607,457 694.85,369.15
  Bottom Layer w10: RF1.10 RF1.10@694.85,328.2
SPI1_MOSI: RF1.11 U1.17 | length 667.9
  Top Layer w8: U1.17 514.53,637.9 505,628.37 505,571.88 496.1,562.98 496.1,510.9 523,484 523,472.75 574.75,421 v1(586,421) ; 549.9,445.85 ccw(c586,481.96) v1@586,430.9 ; 563.55,432.2 ccw(c586,454.64) v1@586,422.9
  Bottom Layer w8: v1@586,411.1 cw(c586,387.21) 602.9,404.1 cw(c619.79,421) v1@595.9,421 ; v1(586,421) 616.11,390.89 ; RF1.11@599.63,351.68 ccw(c561.25,390.89) 616.11,390.89 ; RF1.11@605.23,345.97 ccw(c579.88,371.86) 616.11,371.86 ccw(c652.34,371.86) RF1.11@627,345.97 ; RF1.11 616.11,390.89 ; RF1.11@632.59,351.68 cw(c670.97,390.89) 616.11,390.89
SPI1_NSS: R4.2 RF1.13 U1.14 | length 535.5
  Top Layer w8: v1(554,538) 559,543 559,614 573.58,628.58 U1.14 573.58,733.8 R4.2@563,744.38
  Bottom Layer w8: RF1.13@451.78,357.39 ccw(c448.98,366.63) 458.63,366.63 ; RF1.13 458.63,366.63 ; RF1.13@465.48,357.39 cw(c468.28,366.63) 458.63,366.63 ; 534.28,514.28 ccw(c510.55,538) v1@544.1,538 ; 543.93,523.93 cw(c554,513.86) v1@554,528.1 ; v1(554,538) 554,534 502.1,482.1 502.1,410.1 458.63,366.63
SPI1_SCK: RF1.12 U1.15 | length 590.6
  Top Layer w8: U1.15 553.9,632.02 541,619.12 541,562.62 528.1,549.73 528.1,526.9 v1(566,489) ; v1@556.1,489 ccw(c532.21,489) 549.1,505.9 ccw(c566,522.79) v1@566,498.9
  Bottom Layer w8: RF1.12@525.44,355.17 ccw(c513.21,376) 537.37,376 ; RF1.12 537.37,376.01 ; RF1.12@549.3,355.17 cw(c561.53,376) 537.37,376 ; 553.9,435.89 cw(c619.11,435.89) v1@573,482 ; 553.9,455.2 cw(c599.8,455.2) v1@567.34,487.66 ; 553.9,474.51 cw(c580.48,474.51) v1@561.68,493.32 ; v1(566,489) 553.9,476.9 553.9,392.53 537.37,376.01
SWDCLK: CONN4.4 U1.37 | length 717.8
  Top Layer w8: U1.37 376.73,396.41 389.29,408.97 ; U1.37@377.95,391.75 cw(c392.14,391.75) 382.11,401.79 ; 404.02,408.97 ccw(c404.02,433.28) v1@424.41,420.03 ; v1@417.02,414.85 cw(c412.28,412.66) 415.97,408.97 ; v1@417.7,424.39 cw(c389.29,442.85) 389.29,408.97 ; v1@421.85,410.02 ccw(c419.66,405.28) 415.97,408.97 ; v1(426,419) 415.97,408.97 ; 389.29,408.97 415.97,408.97
  Bottom Layer w8: CONN4.4@170,200 170,270 144,296 144,347.81 223.19,427 351.07,427 372.07,406 413,406 v1(426,419) ; 170,219.47 ccw(c194.81,219.47) CONN4.4@177.27,201.92 ; 170,238.78 ccw(c214.13,238.78) CONN4.4@182.92,207.58
SWDIO: CONN4.3 U1.34 | length 812.7
  Top Layer w8: U1.34 362.33,451.1 372.23,461 ; U1.34@356.75,452.32 ccw(c356.75,468.73) 368.36,457.13 ; 381.39,461 ccw(c381.39,472.84) v1@393.12,471.25 ; v1@385.19,472.33 cw(c372.23,474.08) 372.23,461 ; v1@386.03,466.82 cw(c381.36,464.64) 385,461 ; v1@390.82,462.03 ccw(c388.64,457.36) 385,461 ; v1(395,471) 385,461 ; 372.23,461 385,461
  Bottom Layer w8: 155.38,179.62 ccw(c177.4,201.63) CONN4.3@177.4,170.5 ; CONN4.3@177,163 172,163 149,186 149,260 128,281 128,358 253,483 383,483 v1(395,471) ; 342.13,483 cw(c342.13,418.13) v1@388,464 ; 361.45,483 cw(c361.45,437.45) v1@393.66,469.66 ; 380.76,483 cw(c380.76,456.76) v1@399.32,475.32
USART1_RX: FIL2.1 U1.31 | length 234.9
  Top Layer w8: FIL2.1@177.48,390.31 FIL2.1 195.31,390.31 209,404 209,467.41 251.75,510.16 U1.31
USART1_TX: FIL2.3 U1.30 | length 218.2
  Top Layer w8: FIL2.3@177.48,429.69 FIL2.3 182.68,429.69 193,440 193,474.03 248.81,529.84 U1.30 ; FIL2.3@187.29,429.69 cw(c198.41,429.69) 190.55,437.55
USB_PWR: CONN3.1 D1.2 R5.2 | length 988.4
  Top Layer w15: v1@322,222.37 cw(c322,197.26) 339.76,215.02 ; v1(322,228.77) 326.01,228.77 362.2,192.57 CONN3.1@362.2,168.33
  PWR w8: v1@68,444 cw(c51.11,427.11) 75,427.11 cw(c98.89,427.11) v1@82,444 ; v1(75,451) 75,236.62 96.9,214.73 96.9,203 114.9,185 114.9,172 141.99,144.91 214.14,144.91 244.24,175 291,175 322,206 ; v1@315.25,221.53 cw(c300.76,206) 322,206 ; v1(322,228.77) 322,206 ; v1@328.75,221.53 ccw(c343.24,206) 322,206
  Bottom Layer w8: R5.2@58.08,517.49 cw(c41.39,500.8) 65,500.8 cw(c88.61,500.8) R5.2@71.92,517.49 ; v1@65,460 R5.2 ; 65,479.72 ccw(c103.72,479.72) v1@76.34,452.34 ; 65,499.04 ccw(c123.04,499.04) v1@82,458
  Bottom Layer w15: D1.2 D1.2@344.4,206.37
  Bottom Layer w20: v1(322,228.77) D1.2@344.4,206.37 ; v1@325.76,229.78 ccw(c348.38,235.84) D1.2@336.67,215.56 ; D1.2@333.2,217.57 ccw(c344.4,228.76) D1.2@344.4,212.93
USB_R_N: CONN3.2 R7.2 | length 116.4
  Top Layer w10: CONN3.2@387.8,168.33 387.8,220.17 R7.2@396,228.38 ; CONN3.2@387.8,180.82 cw(c433.59,180.82) R7.2@401.21,213.2 ; 387.8,204.96 cw(c409.45,204.96) R7.2@394.14,220.27
USB_R_P: CONN3.3 R8.2 | length 88.6
  Top Layer w8: CONN3.3@410.79,184.64 ccw(c406.1,191) 414,191 ; CONN3.3@414,186 414,191 ; 414,190.19 ccw(c422.44,190.19) CONN3.3@416.47,184.22 ; 425.3,202.3 cw(c443,184.59) R8.2@443,209.63 ; 426.72,203.72 ccw(c411.04,219.41) R8.2@433.22,219.41 ; R8.2@437,214 414,191
VCC: C1.1 C4.1 C8.2 C9.2 C10.2 C14.1 D2.2 D3.2 D4.2 D5.2 JP1.2 L2.1 R1.1 R2.1 R3.1 R4.1 R9.2 R11.2 R13.2 U1.1 U1.9 U1.24 U1.36 U1.48 U2.3 | length 2994.8
  Top Layer w8: C9.2@265,398.13 ccw(c265,426.49) 285.06,406.43 ; C9.2@270.52,380.85 cw(c280.53,370.85) 280.53,385 ; C9.2@270.52,391.9 ccw(c287.18,408.56) v1@287.18,385 ; C9.2@272.81,390.31 cw(c282.16,390.31) C9.2@275.55,396.93 ; 281.39,386.55 ccw(c284.16,396.92) v1@292.92,390.72 ; 285.33,385.5 cw(c282.31,374.21) v1@292.43,380.05 ; 285.45,406.83 cw(c294.35,397.93) U1.36@294.35,410.52 ; v1@294,378 ccw(c277.11,361.11) 277.11,385 ccw(c277.11,408.89) v1@294,392 ; v1(301,385) 266.38,385 C9.2 290.35,411.73 U1.36 ; C8.2@337,689.38 C8.2@339,691.38 ; R2.1@365.43,738.08 cw(c338.15,710.8) U1.24@376.73,710.8 ; R2.1@371.09,743.74 cw(c357.46,730.12) 376.73,730.12 ; R2.1@373.38,740 376.73,736.65 U1.24 ; R9.2@496,217.21 563.79,217.21 v1(587,194) ; R9.2@497.92,212.49 cw(c509.31,201.1) 509.31,217.21 ; R9.2@497.92,226.32 ccw(c519.91,248.32) 519.91,217.21 ; R1.1@511.62,745 516,745 562.81,791.81 563,791.62 564,790.62 566.38,790.62 600,757 ; R1.1@513.59,753.78 ccw(c513.59,780.79) 532.69,761.69 ; R1.1@523.37,744 cw(c543.58,744) 529.29,758.29 ; 543.3,772.3 cw(c564,751.6) 564,780.87 cw(c564,751.6) 584.7,772.3 ; 548.96,777.96 ccw(c536.28,790.65) R4.1@554.22,790.65 ; R4.1@573.78,790.65 ccw(c591.72,790.65) 579.04,777.96 ; v1@577.1,194 ccw(c553.21,194) 570.1,210.9 ccw(c587,227.79) v1@587,203.9 ; v1@595.11,748.61 ccw(c590.35,757) 600,757 ; v1@600,730.1 cw(c600,685.39) R3.1@631.62,717.01 ; v1@600,738.1 cw(c600,712.71) 617.96,730.66 ; v1@600.14,738.11 cw(c601.29,722.26) 615.05,730.2 ; v1@604.89,748.61 cw(c609.65,757) 600,757 ; v1@610.45,738.17 cw(c586.88,714.59) R3.1@620.22,714.59 ; 620.19,728.43 ccw(c630,738.25) R3.1@630,724.37 ; R3.1@635,713.62 608.62,740 v1(600,740) 600,757 ; U1.9 682.59,569.21 687.27,573.9 ; U1.9@675.88,570.41 ccw(c678.29,582.88) 687.27,573.9 ; v1(680,65) 699,65 ; v1@688.11,59.33 cw(c699,51.71) 699,65 ; v1@688.11,70.67 ccw(c699,78.29) 699,65 ; C14.1@697.76,573.9 ccw(c697.76,586.2) C14.1@709.62,582.95 ; C14.1@701.91,585.06 cw(c687.27,589.07) 687.27,573.9 ; 702.71,61.29 ccw(c725.75,84.33) JP1.2@725.75,51.75 ; 706.93,57.07 cw(c689.86,40) JP1.2@714,40 ; C14.1@717.31,575.19 cw(c717.31,565.84) C14.1@723.93,572.45 ; v1@722.47,375.75 cw(c720.51,370.62) 726,370.62 ; v1@724.23,549.56 ccw(c686.03,555.65) C14.1 ; C14.1@724.47,571.91 cw(c705.16,552.6) v1@732.13,548.3 ; C14.1@725.13,583 ccw(c753.49,583) 733.43,562.94 ; v1(726,385) 726,370.62 ; v1@727.89,384.87 ccw(c761.1,382.59) R13.2@737.56,359.06 ; v1@729.53,375.75 ccw(c731.49,370.62) 726,370.62 ; 729.94,366.68 ccw(c750,386.73) R13.2@750,358.37 ; JP1.2 724,40 699,65 ; v1@730.47,557.25 ccw(c728.51,562.38) 734,562.38 ; v1(734,548) 734,562.38 ; 734.7,361.92 cw(c721.36,348.59) R13.2@740.22,348.59 ; v1@735.87,384.32 ccw(c784.37,381) R13.2 726,370.62 ; v1@737.53,557.25 cw(c739.49,562.38) 734,562.38 ; 687.27,573.9 704.28,573.9 C14.1 ; C14.1 734,562.38
  Top Layer w10: v1@674.14,1013.91 674.14,1025.14 683,1034 745.79,1034 D2.2@779.79,1000 ; 753.52,1026.27 ccw(c781.5,1054.25) D2.2@781.5,1014.68 ; 757.63,1022.16 cw(c735.47,1000) D2.2@766.81,1000
  Top Layer w12: C8.2@327.89,681.33 cw(c305.9,659.34) v1@337,659.34 ; v1@330.72,661.79 ccw(c319.61,670.26) 333.11,673.88 ccw(c348.84,678.09) v1@340.87,663.89 ; v1@331.42,662.58 ccw(c317.93,676.07) 337,676.07 ccw(c356.07,676.07) v1@342.58,662.58 ; C8.2@336.11,685.27 cw(c346.03,675.35) 346.03,689.38 cw(c346.03,703.41) C8.2@336.11,693.49 ; v1(337,657) 337,689.38 U1.24@375,689.38
  Top Layer w15: U1.48@597,377.62 C10.2 ; U1.1@639,408 C10.2 ; C10.2@642.05,378.51 cw(c657.71,362.84) 657.71,385 ; v1@721.48,380.48 ccw(c710.55,369.55) 710.55,385 ccw(c710.55,400.45) v1@721.48,389.52 ; v1(726,385) 646.38,385 C10.2 ; D5.2@772.88,828.62 ccw(c752.08,849.42) 781.5,849.42 ccw(c810.91,849.42) D5.2@790.11,828.62 ; D4.2@772.88,871.38 cw(c752.08,850.58) 781.5,850.58 cw(c810.91,850.58) D4.2@790.11,871.38 ; D4.2@772.88,888.62 ccw(c752.08,909.42) 781.5,909.42 ccw(c810.91,909.42) D4.2@790.11,888.62 ; D3.2@772.88,931.38 cw(c752.08,910.58) 781.5,910.58 cw(c810.91,910.58) D3.2@790.11,931.38 ; D3.2@772.88,948.62 ccw(c752.08,969.42) 781.5,969.42 ccw(c810.91,969.42) D3.2@790.11,948.62 ; D2.2@772.88,991.38 cw(c752.08,970.58) 781.5,970.58 cw(c810.91,970.58) D2.2@790.11,991.38 ; D2.2@779.79,1000 D2.2 D3.2 D4.2 D5.2
  Bottom Layer w8: R11.2@93.08,424.51 ccw(c66.73,450.86) 104,450.86 ; R11.2@98.74,418.85 ccw(c86.05,431.54) 104,431.54 ccw(c113.95,431.54) R11.2@106.92,424.51 ; R11.2 104,419.62 104,464 v1(122,482) ; v1@112.1,482 cw(c88.21,482) 105.1,465.1 cw(c122,448.21) v1@122,472.1
  Bottom Layer w15: L2.1 L2.1@636.5,1023
  Bottom Layer w20: L2.1@636.5,1023 668.15,1023 v1(676.82,1014.33) ; L2.1@641.34,1031.85 ccw(c662.71,1053.21) 662.71,1023 ; L2.1@646.48,1023 cw(c646.48,983.99) v1@674.06,1011.57
  Bottom Layer w30: v1(359,252) 360,252 390.47,221.53 C1.1 446,221.53 448.02,223.55 U2.3
VCC_UNREG: CONN1.2 CONN2.2 D1.1 | length 566.3
  Top Layer w20: v1@246.68,238.69 v1(247,239)
  Top Layer w23: v1(140,625) v1@142.68,627.69
  Top Layer w24: v1@142.68,627.69 CONN1.2 ; CONN2.2 v1@246.68,238.69
  PWR w35: v1(140,625) 140,562 246,456 v1@246,242
  Bottom Layer w24: v1(247,239) D1.1@269,217
pads on no net: CONN3.4 U1.2 U1.3 U1.4 U1.10 U1.11 U1.13 U1.19 U1.25 U1.26 U1.27 U1.28 U1.38 U1.39 U1.40 U1.46

## Polygon pours and split planes (outlines as drawn)
VCC on PWR "PWR Layer-VCC" (solid, remove dead copper, pour order 10): 0,47 826.77,47 826.77,1028 0,1028
GND on GND "GND Layer-GND" (solid, remove dead copper, pour order 12): 0,0 826.77,0 826.77,1063.1 0,1063.1
GND on Bottom Layer "Bottom Layer-GND" (solid, remove dead copper, pour order 14): 0,0 826.77,0 826.77,1063.1 0,1063.1
GND on Top Layer "Top Layer-GND" (solid, remove dead copper, pour order 8): 0,0 826.77,0 826.77,1063.1 0,1063.1

## Keep-outs
Keep-Out Layer:
  the board outline again, w1

## Other copper
Top Layer:
  rectangle net GND: 782,438 810,500
  pour cut-out: 687,534 752,535 818,536 818,400 687,400
PWR:
  pour cut-out: 0,1064 0,858 197,858 197,1064

## Silkscreen, mask and mechanical layers (free items; w line width, h text height)
Top Overlay:
  text "Pwr" at 564,981 h60
  text "OPLINK" at 315,952 h80
  text "Link" at 560,921 h60
  text "MINI" at 348,895 h80
  text "RX" at 584,861 h60
  text "TX" at 588,801 h60
  text "Flexi" at 74,777 h55
  text "Port" at 84,737 h55
  text "-" at 232,652 h60
  text "+" at 235,609 h60
  text "TX" at 231,578 h30
  text "RX" at 231,539 h30
  text "GND" at 235,268 h30
  text "+" at 262,219 h60
  text "TX" at 235,189 h30
  text "RX" at 235,150 h30
  text "SBL" at 762,111 h45 r270
  text "Main" at 88,59 h50
  text "+" at 706,39 h40 r90
  text "Port" at 88,19 h55
Bottom Overlay:
  text "CLK" at 227,216 h30
  text "IO" at 254,153 h30
  text "R" at 247,113 h30
  text "GND" at 288,74 h30
Dimensions:
  the board outline again, w10
  text "Board Outline" at 36,1097 h140

## Dimensions
2.08,-35.68 to 829,-34 on Dimensions
-57,1 to -60,1064 on Dimensions